# Altium PCB 蓝牙钥匙球锁20710.PcbDoc (part 1 of 2)
Units mil, origin at the board's own origin, x right, y up, seen from the top; angles counter-clockwise.
Board outline 1980 x 1974 mil, 2 copper layers (Top Layer, Bottom Layer); 82 components, 54 nets, 254 pads, 214 vias.
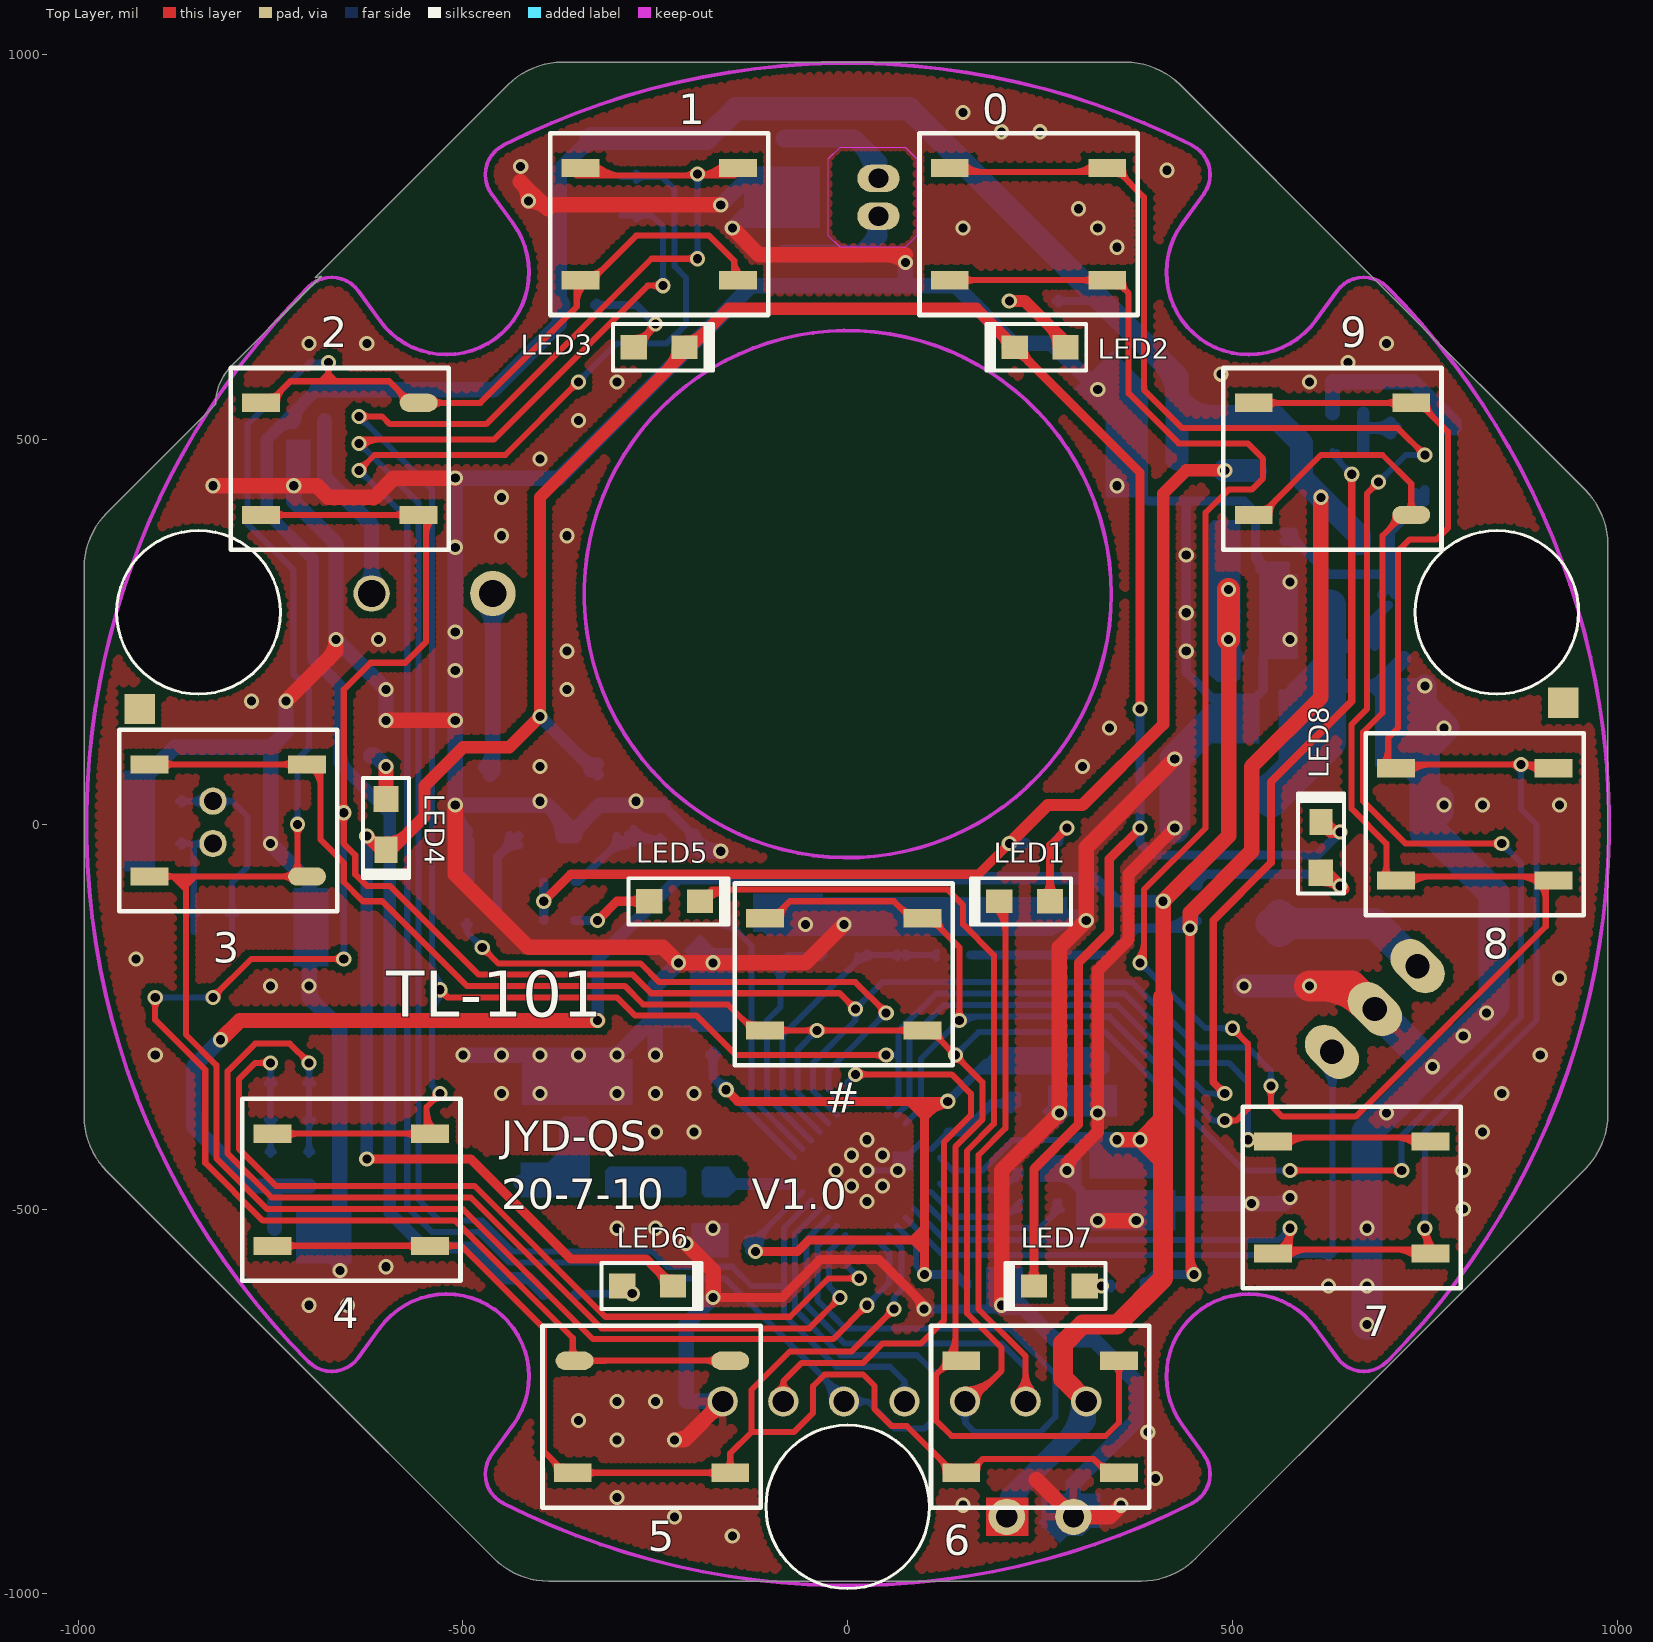
[diagram p0: Top Layer view]
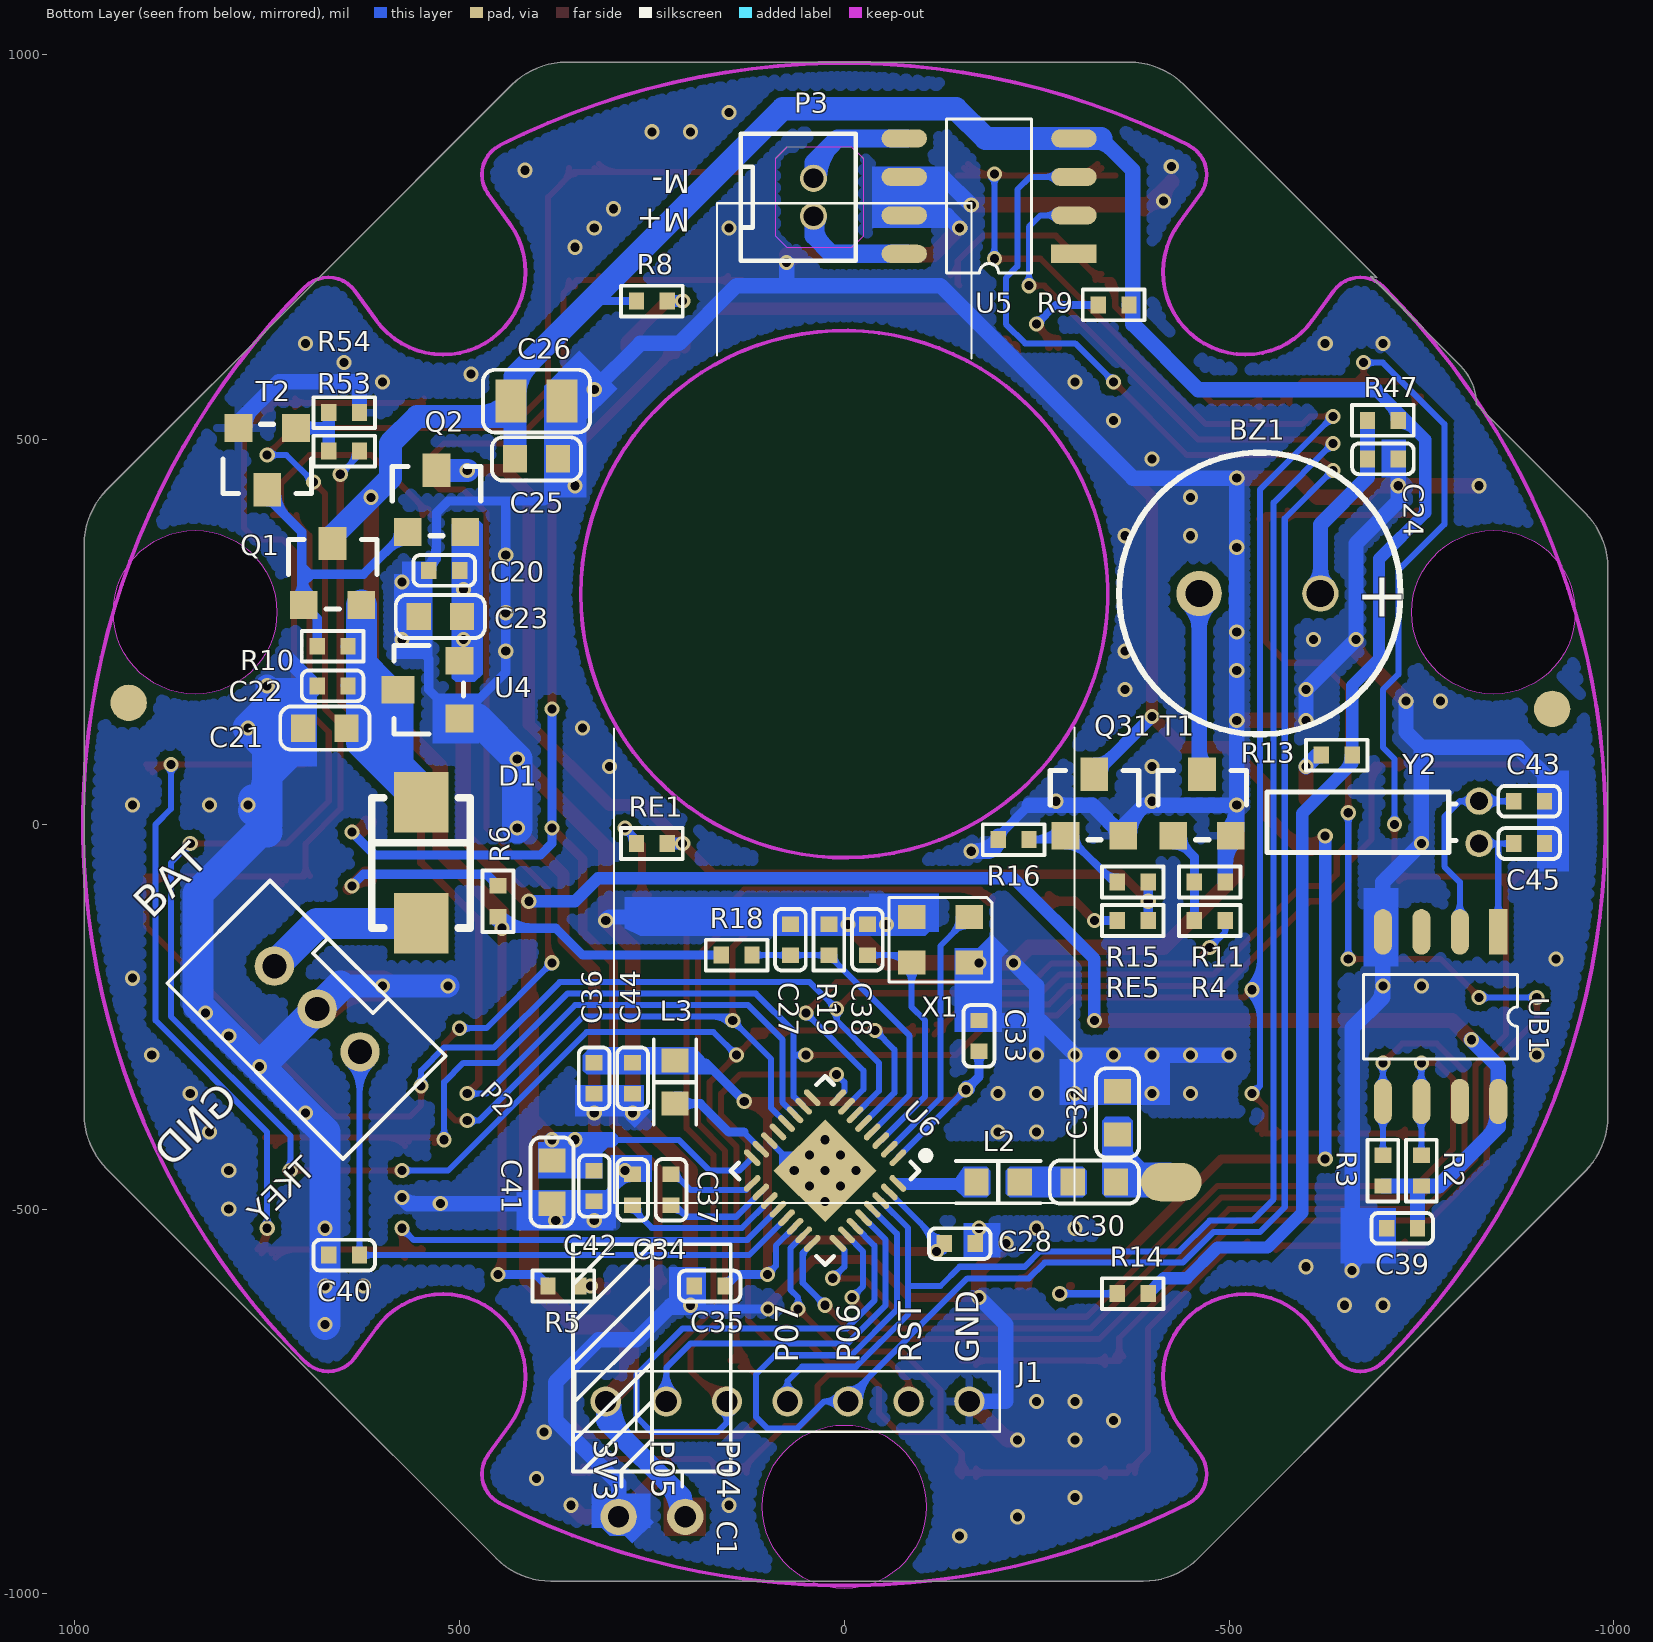
[diagram p1: Bottom Layer view, seen from below]
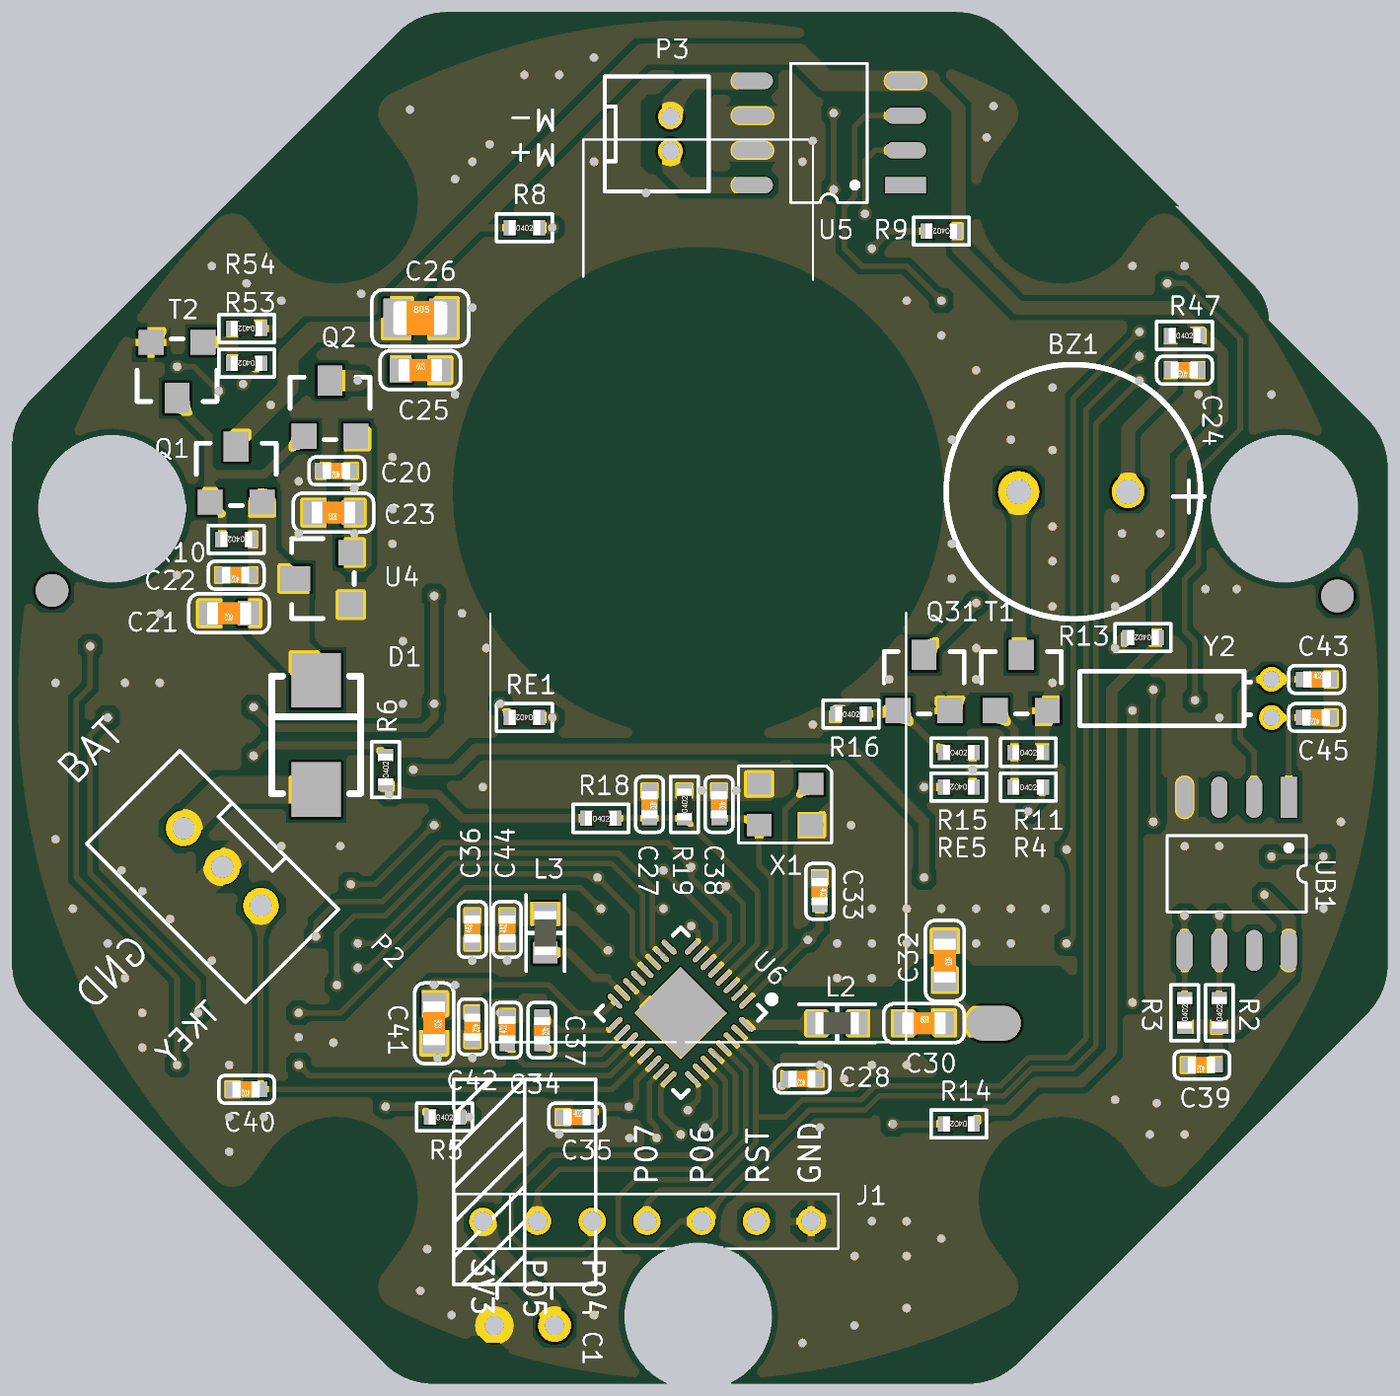
[diagram p3: 3D render of the assembled board from below, using the file's embedded part models]

## Layer stack, top to bottom
Top Layer: signal copper 1.4
Dielectric: core 12.6, FR-4, Dk 4.8
Bottom Layer: signal copper 1.4

## Board outline
-684.23,712.41 -800.72,595.92 ccw(c-751.22,546.41) -821.23,546.41 -962.94,404.7 ccw(c-892.23,333.99) -992.23,333.99 -992.23,-54.59 -992.23,-380.17 ccw(c-892.23,-380.17) -962.94,-450.88 -734.23,-679.59 -459.52,-954.3 ccw(c-388.81,-883.59) -388.81,-983.59 -15.23,-983.59 381.35,-983.59 ccw(c381.35,-883.59) 452.06,-954.3 718.77,-687.59 958.48,-447.88 ccw(c887.77,-377.17) 987.77,-377.17 987.77,119.41 987.77,363.99 ccw(c887.77,363.99) 958.48,434.7 682.77,710.41 432.06,961.12 ccw(c361.35,890.41) 361.35,990.41 -33.23,990.41 -370.81,990.41 ccw(c-370.81,890.41) -441.52,961.12 -692.23,710.41
cut-out: 843.7,381.89 ccw(c843.7,275.59) 737.4,275.59 ccw(c843.7,275.59) 843.7,169.29 ccw(c843.7,275.59) 950,275.59 ccw(c843.7,275.59)
cut-out: 0,-780.71 ccw(c0,-887.01) -106.3,-887.01 ccw(c0,-887.01) 0,-993.31 ccw(c0,-887.01) 106.3,-887.01 ccw(c0,-887.01)
cut-out: -843.7,381.89 ccw(c-843.7,275.59) -950,275.59 ccw(c-843.7,275.59) -843.7,169.29 ccw(c-843.7,275.59) -737.4,275.59 ccw(c-843.7,275.59)

## Design rules (kind name [scope] priority, off if disabled: settings)
Clearance [All] p1: gap=6
ComponentClearance [All] p1: gap=0 collisioncheckmode=3 verticalgap=0 showdistances=FALSE
FabricationTestpoint [(IsPad And (OnTopLayer Or OnBottomLayer))] p1: side=3 testpointundercomponent=TRUE minsize=40 maxsize=100 preferedsize=60 minholesize=0 maxholesize=40 preferedholesize=32 testpointgrid=1 allowsidetop=TRUE allowsidebottom=TRUE usegrid=TRUE gridtolerance=0.01
HoleSize [All] p1: absolutevalues=TRUE maxlimit=1000 minlimit=1 maxpercent=80.000 minpercent=20.000
MinimumSolderMaskSliver [All] p1: minsoldermaskwidth=0
PlaneConnect PlaneConnect_1 [All] p1: planeconnectstyle=Relief reliefexpansion=20 reliefentries=4 reliefconductorwidth=10 reliefairgap=10
PolygonConnect PolygonConnect_1 [IsVia] p1: connectstyle=Direct reliefconductorwidth=10 reliefentries=4 polygonreliefangle="90 Angle" airgapwidth=10
PolygonConnect [All] p2: connectstyle=Relief reliefconductorwidth=10 reliefentries=4 polygonreliefangle="90 Angle" airgapwidth=10
RoutingVias [All] p1: holewidth=15.75 width=23.62 viastyle="Through Hole" minholewidth=11.81 minwidth=19.68 maxholewidth=15.75 maxwidth=23.62
SilkToSilkClearance [All] p1: silktosilkclearance=0
SilkToSolderMaskClearance [IsPad] p1: minsilkscreentomaskgap=0 clearancetoexposedcopper=TRUE
SolderMaskExpansion [All] p1: expansion=4
Width [All] p1: maxlimit=80 minlimit=7.87 preferedwidth=10
21 further rules are at their usual default settings.

## Components (designator, comment, footprint, x,y, rotation, side; value= is the part's Value field where it differs from the comment)
0 "SW" KEY_5.2*3.7*6.4#1 235,780 r0 top
1 "SW" KEY_5.2*3.7*6.4#1 -245,780 r0 top
2 "SW" KEY_5.2*3.7*6.4#2 -660,475 r180 top
3 "SW" KEY_5.2*3.7*6.4#3 -805,5 r0 top
4 "SW" KEY_5.2*3.7*6.4#1 -645,-475 r0 top
5 "SW" KEY_5.2*3.7*6.4#4 -255,-770 r0 top
6 "SW" KEY_5.2*3.7*6.4#1 250,-770 r0 top
7 "SW" KEY_5.2*3.7*6.4#1 655,-485 r0 top
8 "SW" KEY_5.2*3.7*6.4#1 815,0 r180 top
9 "SW" KEY_5.2*3.7*6.4#5 630,475 r180 top
# "SW" KEY_5.2*3.7*6.4#1 -5,-195 r180 top
BZ1 "BUZZER" BUZZER_D93_L40 -540,300 r0 bottom
C1 "220uF/6.3V" R5*8_1 250,-900 r0 bottom
C20 "0.1uF" 0402C 520,330 r0 bottom
C21 "22uF/10V" 0603C 675,125 r0 bottom
C22 "0.1uF" 0402C 665,180 r0 bottom
C23 "10uF/10V" 0603C 525,270 r0 bottom
C24 "10uF/10V" 0402C -700,475 r0 bottom
C25 "0.1uF" 0603C 400,475 r180 bottom
C26 "22uF" 0805C 400,550 r180 bottom
C27 "1nF" 0402C 70,-150 r270 bottom
C28 "1uF/6.3V" 0402C -150,-545 r0 bottom
C30 "1.5pF" 0603C -325,-465 r180 bottom
C32 "1pF" 0603C -355,-375 r270 bottom
C33 "0.1uF" 0402C -175,-275 r270 bottom
C34 "0.1uF" 0402C 275,-475 r90 bottom
C35 "1uF" 0402C 175,-600 r180 bottom
C36 "0.1uF" 0402C 325,-330 r90 bottom
C37 "0.1uF" 0402C 225,-475 r270 bottom
C38 "12pF" 0402C -30,-150 r270 bottom
C39 "0.1uF" 0402C -725,-525 r0 bottom
C40 "1nF" 0402C 650,-560 r0 bottom
C41 "10uF/6.3V" 0603C 380,-465 r270 bottom
C42 "0.1uF" 0402C 325,-470 r270 bottom
C43 "22pF" 0402C -890,30 r180 bottom
C44 "10uF/6.3V" 0402C 275,-330 r90 bottom
C45 "22pF" 0402C -890,-25 r0 bottom
D1 "SS14" DO-214AA 550,-50 r270 bottom
J1 "7P" 7P-2.0MM 310,-750 r180 bottom
L2 "2nH" 0603L -200,-465 r0 bottom
L3 "2.2uH" 0603L 220,-335 r270 bottom
LED1 "GREEN" 0603LED 230,-100 r180 top
LED2 "Blue" 0603LED 250,620 r180 top
LED3 "Blue" 0603LED -245,620 r0 top
LED4 "Blue" 0603LED -600,0 r270 top
LED5 "Red" 0603LED -225,-100 r0 top
LED6 "Blue" 0603LED -260,-600 r0 top
LED7 "Blue" 0603LED 275,-600 r180 top
LED8 "Blue" 0603LED 615,-30 r90 top
P2 "电池盒" B3B-PH 685,-240 r225 bottom
P3 "电机接口" 2P-1.25 40,815 r270 bottom
Q1 "SI2301" "SOT-23 - GDS" 665,325 r180 bottom
Q2 "SI2301" "SOT-23 - GDS" 530,420 r180 bottom
Q31 "PMBT3904" "SOT-23 - BCE" -325,25 r180 bottom
R2 "10K" 0402R -750,-450 r90 bottom
R3 "10K" 0402R -700,-450 r90 bottom
R4 "1K" 0402R -475,-125 r180 bottom
R5 "1K" 0402R 365,-600 r180 bottom
R6 "1K" 0402R 450,-100 r90 bottom
R8 "1K" 0402R 250,680 r180 bottom
R9 "1K" 0402R -350,675 r0 bottom
R10 "100K" 0402R 665,231.42 r0 bottom
R11 "10K" 0402R -475,-75 r180 bottom
R13 "1k" 0402R -640,90 r0 bottom
R14 "1K" 0402R -375,-610 r0 bottom
R15 "10K" 0402R -375,-75 r180 bottom
R16 "4.7K" 0402R -220,-20 r180 bottom
R18 "500K%1" 0402R 140,-170 r180 bottom
R19 "100K%1" 0402R 20,-150 r90 bottom
R47 "10R" 0402R -700,525 r180 bottom
R53 "1K" 0402R 650,485 r0 bottom
R54 "10K" 0402R 650,535 r0 bottom
RE1 "1K" 0402R 250,-25 r0 bottom
RE5 "1K" 0402R -375,-125 r0 bottom
T1 "SS8050" SOT-23-3L -465,25 r180 bottom
T2 "PMBT3904" SOT-23-3L 750,475 r0 bottom
U4 "HT7533" SOT-23-3L 540,175 r90 bottom
U5 "CP2117" SOP8 -188.23,816.41 r0 bottom (schematic designator U8)
U6 "BK3431Q" QFN32_4*4*0.4 25,-450 r315 bottom
UB1 "PCF8563" SOP8 -775,-250 r270 bottom (schematic designator U5)
X1 "16MHZ" XTAL3225 -125,-150 r0 bottom
Y2 "32.768KHZ" 晶振-9 -825,-25 r90 bottom

## Footprints (in the part's own frame and the unit in brackets; to place one, negate y for a bottom-side part, rotate by r counter-clockwise, add the part's x,y. Pads: shape width x height; smd on the part's side, far side on the other; paste and mask are expansions set on the pad)
2P-1.25 [mm]
  round 0.9 / inner round 0.9 / far side oval 0.9x1.4 hole 0.65: 1(-0.625,0) 2(0.625,0)
  silkscreen extent -2.1,-2.4 2.1,1.4
7P-2.0MM [mm]
  round 1 hole 0.7 mask+0.05: 1(0,0) 2(2,0) 3(4,0) 4(6,0) 5(8,0) 6(10,0) 7(12,0)
  silkscreen extent -1,-1 13,1
0402C [mil]
  rect 20x22 smd mask+2: 1(-20,0) 2(20,0)
  silkscreen extent -40,-20 40,20, body extent -19,-12 20,12, height 8
0402R [mil]
  rect 20x22 smd mask+2: 1(-20,0) 2(20,0)
  silkscreen extent -40,-20 40,20, body extent -23,-11 23,11, height 16
0603C [mm]
  rect 0.8x0.9 smd: 1(-0.711,0) 2(0.711,0)
  silkscreen extent -1.47,-0.71 1.47,0.71, body extent -0.8,-0.4 0.8,0.4, height 0.3
0603L [mm]
  rect 0.8x0.9 smd: 1(-0.711,0) 2(0.711,0)
  silkscreen extent -1.4,-0.7 1.4,0.7, body extent -0.82,-0.41 0.82,0.41, height 0.46
0603LED [mil]
  rect 34x32 smd: 1(-33,0)
  rect 34x30 smd: 2(33,0)
  silkscreen extent -60,-30 70,30, body extent -31,-16 31,16, height 24
0805C [mil]
  rect 40x56 smd: 1(-33,0) 2(33,0)
  silkscreen extent -70,-41 70,41, body extent -39,-25 39,25, height 30
B3B-PH [mm]
  round 1.3 / inner round 1.3 / far side oval 1.3x2 hole 0.8 mask+0.05: 1(-2,0) 2(0,0) 3(2,0)
  silkscreen extent -4.1,-2.9 4.1,1.9
BUZZER_D93_L40 [mm]
  round 1.2 hole 0.9: 1(-2,0)
  round 1.5 hole 0.9: 2(2,0)
  silkscreen extent -4.65,-4.65 4.65,4.65
DO-214AA [mm]
  rect 2x1.8 smd: 1(2,0) 2(-2,0)
  silkscreen extent -2.15,-1.63 2.15,1.63
KEY_5.2*3.7*6.4#1 [mm]
  rect 1.25x0.6 smd: 1(-2.6,1.85) 1(2.6,1.85) 2(-2.6,-1.85) 2(2.6,-1.85)
  silkscreen extent -3.6,-3 3.6,3
KEY_5.2*3.7*6.4#2 [mm]
  rect 1.25x0.6 smd: 1(-2.6,1.85) 1(2.6,1.85) 2(2.6,-1.85)
  oval 1.25x0.6 smd: 2(-2.6,-1.85)
  silkscreen extent -3.6,-3 3.6,3
KEY_5.2*3.7*6.4#3 [mm]
  rect 1.25x0.6 smd: 1(-2.6,1.85) 1(2.6,1.85) 2(-2.6,-1.85)
  oval 1.25x0.6 smd: 2(2.6,-1.85)
  silkscreen extent -3.6,-3 3.6,3
KEY_5.2*3.7*6.4#4 [mm]
  oval 1.25x0.6 smd: 1(-2.54,1.85) 1(2.6,1.85)
  rect 1.25x0.6 smd: 2(-2.6,-1.85) 2(2.6,-1.85)
  silkscreen extent -3.6,-3 3.6,3
KEY_5.2*3.7*6.4#5 [mm]
  oval 1.25x0.6 smd: 1(-2.6,1.85)
  rect 1.25x0.6 smd: 1(2.6,1.85) 2(-2.6,-1.85) 2(2.6,-1.85)
  silkscreen extent -3.6,-3 3.6,3
QFN32_4*4*0.4 [mm]
  rect 2.4x2.4 smd paste-0.025 mask+0.051: 0(0,0)
  oval 0.7x0.2 smd paste-0.025 mask+0.051: 1(-2,1.4) 2(-2,1) 3(-2,0.6) 4(-2,0.2) 5(-2,-0.2) 6(-2,-0.6) 7(-2,-1) 8(-2,-1.4) 17(2,-1.4) 18(2,-1) 19(2,-0.6) 20(2,-0.2) 21(2,0.2) 22(2,0.6) 23(2,1) 24(2,1.4)
  oval 0.2x0.7 smd paste-0.025 mask+0.051: 9(-1.4,-2) 10(-1,-2) 11(-0.6,-2) 12(-0.2,-2) 13(0.2,-2) 14(0.6,-2) 15(1,-2) 16(1.4,-2) 25(1.4,2) 26(1,2) 27(0.6,2) 28(0.2,2) 29(-0.2,2) 30(-0.6,2) 31(-1,2) 32(-1.4,2)
  silkscreen extent -2.82,-2.2 2.2,2.2
R5*8_1 [mm]
  round 1.2 hole 0.7 paste+0: 1(-1.1,0)
  round 1.2 hole 0.7: 2(1.1,0)
  silkscreen extent -2.6,-9 2.6,-1
SOP8 [mm]
  rect 1.5x0.6 smd mask+0.05: 1(-2.8,1.905)
  oval 1.5x0.6 smd mask+0.05: 2(-2.8,0.635) 3(-2.8,-0.635) 4(-2.8,-1.905) 5(2.8,-1.905) 6(2.8,-0.635) 7(2.8,0.635) 8(2.8,1.905)
  round 0.4 on Bottom Overlay mask+0.05: ""(-0.949,1.905)
  silkscreen extent -1.4,-2.54 1.4,2.54
"SOT-23 - BCE" [mil]
  rect 36x36 smd: B(-37.4,-40) E(37.4,-40)
  rect 36x43.31 smd: C(0,40)
  silkscreen extent -57,-45 58,45
"SOT-23 - GDS" [mil]
  rect 36x43.31 smd: D(0,40)
  rect 36x36 smd: G(-37.4,-40) S(37.4,-40)
  silkscreen extent -57,-45 58,45
SOT-23-3L [mil]
  rect 36x36 smd: 1(-37.4,-40) 2(37.4,-40)
  rect 36x43.31 smd: 3(0,40)
  silkscreen extent -57,-45 58,45
XTAL3225 [mm]
  rect 0.9x0.8 smd: 1(-0.95,-0.75) 2(0.95,-0.75) 3(0.95,0.75) 4(-0.95,0.75)
  silkscreen extent -1.7,-1.4 1.7,1.4
晶振-9 [mm]
  round 0.9 hole 0.6: 1(0,0) 2(1.4,0)
  rect 0x0 smd: 3(0.635,8)
  silkscreen extent -0.3,0.76 1.7,7

## Part data
0 1 2 3 4 5 6 7 8 9 #: "Switch"
BZ1: "Buzzer"
C1 C21 C23: library part CAP-P, "Capacitor, tolerance ±20%"
C20 C22 C25 C26 C27: library part CAP-NP, "Capacitor, Ceramic"
C24: library part C_0_Dup1
C28 C30 C32 C33 C34 C35 C36 C37 C38 C41 C42 C44: library part Cap, "Capacitor"
C39 C40 C43 C45: library part C
D1: library part D
L2 L3: "Power Inductor, 4.7uH, 0.7A, 260mR DCR"
LED1 LED2 LED3 LED4 LED5 LED6 LED7 LED8: library part LED
P2: library part "Header 3", "Header, 3-Pin"
Q1 Q2: library part PWRMOSFET_EP_DGS_0
R2 R3: library part RES
R4 R11 R47: library part R_Dup1
R5 R6 R8 R9 R10 R13 R14 R15 R16 R53 R54 RE1 RE5: library part R
R18 R19: library part Res2, "Resistor"
T1 T2: library part NPN_BJT, "Bipolar Junction Transistor"
U4: library part XC6206P302M
U5: library part AM24LC02_0
UB1: library part IC8
Y2: library part 晶振

## Free pads (board coordinates)
  round 47.24 hole 125.98: 1(0,-887.01) 2(-843.7,275.59) 3(843.7,275.59)
  oval 78.74x50 smd far side: FR(-425,-465)
  rect 39.37x39.37 smd: MARK(-920,150) MARK(930,157.93)
  round 47.24 smd far side: MARK(-920,150) MARK(930,157.93)

## Via types
v1: diameter 19.68, hole 11.81, Top Layer to Bottom Layer, tented both sides, 214 vias

## Nets (pads, with @x,y where several pads share a name; then routed paths per layer and width w, separated by ;. In a path a pad name is that pad's centre, name@x,y a point inside that pad or via, vN(x,y) a via of type N, cw(c..) or ccw(c..) an arc to the next point about the centre after c; other vN are vias at no path point)
BAT_ADC: C27.2 R18.2 R19.1 U6.4 | length 503.5
  Bottom Layer w7.87: U6.4@-36.25,-399.89 -85,-351.14 -85,-275 R19.1@20,-170 R18.2@115,-170 ; 7.94,-182.06 ccw(c-4.11,-170) R19.1@12.94,-170 ; R19.1@10.36,-179.64 cw(c19,-188.29) R19.1@19,-176.06 ; R19.1@25.29,-174.29 cw(c35.64,-184.64) 35.64,-170 cw(c35.64,-155.36) R19.1@25.29,-165.71 ; C27.2@64.71,-174.29 ccw(c54.36,-184.64) 54.36,-170 ccw(c54.36,-155.36) C27.2@64.71,-165.71 ; C27.2@75.29,-174.29 cw(c85.64,-184.64) 85.64,-170 cw(c85.64,-155.36) C27.2@75.29,-165.71 ; R18.2@115.71,-174.29 ccw(c105.36,-184.64) 105.36,-170 ccw(c105.36,-155.36) R18.2@115.71,-165.71
BEEP: R4.2 U6.7 | length 876.3
  Top Layer w7.87: v1@-475,-165.91 cw(c-475,-180.16) -464.92,-170.08 cw(c-454.84,-160) v1@-469.09,-160 ; v1(-475,-160) -454.13,-180.87 -269.13,-180.87 -245,-205 10,-205 v1(50,-245) ; v1@44.09,-245 ccw(c29.84,-245) 39.92,-234.92 ccw(c50,-224.84) v1@50,-239.09
  Bottom Layer w7.87: R4.2@-499.15,-130.42 cw(c-508.13,-140) -495,-140 ; R4.2@-495,-125 -495,-140 ; R4.2@-490.85,-130.42 ccw(c-481.87,-140) -495,-140 ; v1@-480.91,-160 ccw(c-495.16,-160) -485.08,-149.92 ccw(c-475,-139.84) v1@-475,-154.09 ; v1(-475,-160) -495,-140 ; U6.7@-2.84,-366.48 -25,-344.32 -25,-320 v1(50,-245) ; v1@44.09,-245 cw(c29.84,-245) 39.92,-255.08 cw(c50,-265.16) v1@50,-250.91
GND: C1.2 C20.2 C21.2 C22.2 C23.2 C24.1 C25.2 C26.2 C27.1 C28.1 C32.1 C33.1 C34.2 C35.1 C36.1 C38.1 C39.2 C40.2 C41.2 C42.2 C43.2 C44.1 C45.1 J1.7 P2.2 Q31.E R11.2 R16.1 R19.2 R54.1 T1.2 T2.2 U4.1 U5.6 U5.7 U6.0 U6.14 UB1.4 X1.2 X1.4 | length 14985.3
  Top Layer w12: v1(-175,-615) -85,-615 -35.5,-565.5 40.5,-565.5 v1@100,-625 ; 88.2,-613.2 cw(c71.4,-630) v1@95.16,-630
  Top Layer w16: v1(285,-450) 285,-440 325,-400 325,-190 365,-150 365,-65 v1(425,-5) ; v1@286.84,-450 cw(c315.43,-450) 295.22,-429.78
  Top Layer w20: v1(-825,440) v1(-720,440) -690,440 -675,425 -615,425 -590,450 v1(-510,450) ; v1(-730,160) -665,225 v1(-665,240) ; -675.34,214.66 ccw(c-700.68,240) v1@-664.84,240 ; v1(-600,135) v1(-510,135) ; v1(-510,25) -510,-65 -415,-160 -240,-160 v1(-220,-180) v1(-175,-180) -55,-180 v1(-5,-130) ; -425.34,835.34 cw(c-450.68,810) v1@-414.84,810 ; -425,835 -395,805 v1(-165,805) ; v1@-415,810.16 cw(c-415,774.32) -389.66,799.66 ; v1@-225,-800.16 ccw(c-225,-770.22) -203.83,-791.39 ; v1(-225,-800) -212.44,-800 J1.7@-162.44,-750 ; v1(-210,-545) -175,-580 v1(-175,-615) ; J1.7@-172.13,-750 cw(c-195.51,-750) -178.97,-766.53 cw(c-162.44,-783.07) J1.7@-162.44,-759.68 ; v1(-150,775) -115,740 75,740 ; 51.24,740 cw(c51.24,706.24) v1@75.11,730.11 ; v1(200,-625) 200,-450 v1(275,-375) 275,-160 v1(310,-125) 310,-30 v1(425,85) ; 245.12,-851.81 C1.2@293.31,-900 340,-900 v1(355,-885) ; C1.2@283.62,-900 ccw(c260.24,-900) 276.77,-883.47 ccw(c293.31,-866.93) C1.2@293.31,-890.32 ; C1.2@300.16,-906.85 cw(c316.69,-923.38) 316.69,-900 cw(c316.69,-876.62) C1.2@300.16,-893.15 ; v1(325,-515) v1(375,-515)
  Top Layer w40: v1(600,-210) 655,-210 P2.2@685,-240 ; 612.86,-210 cw(c612.86,-292.66) P2.2@671.3,-234.21
  Bottom Layer w7.87: v1(25,-450) 58.41,-450 U6.14@97.38,-411.03 ; U6.0@29.18,-454.18 cw(c39.26,-464.26) 39.26,-450 cw(c39.26,-435.74) U6.0@29.18,-445.82 ; U6.0@60.82,-454.18 ccw(c50.74,-464.26) 50.74,-450 ccw(c50.74,-435.74) U6.0@60.82,-445.82 ; U6.0@70.91,-450 cw(c101.08,-450) 79.74,-428.66
  Bottom Layer w10: C34.2@276,-460 cw(c276,-481.73) 291.36,-466.36 ; C34.2@280,-450 C34.2@275,-450 ; C34.2@280.16,-449.92 cw(c275,-449.84) C34.2@275,-455 280,-455 315,-490 C42.2@325,-490 325,-493 C42.2@323,-493 ; C34.2@281.2,-453 ccw(c275,-457.9) C34.2@275,-450 ; C34.2@281.2,-447 cw(c275,-442.1) C34.2@275,-450 ; v1@289.84,-450 ccw(c325.68,-450) 300.34,-475.34 ; 300.1,-475.1 ccw(c324,-451.2) C42.2@324,-485
  Bottom Layer w11.81: C26.2@357.03,532.03 cw(c332.97,507.97) 367,507.97 cw(c401.03,507.97) C26.2@376.97,532.03 ; 367,442.59 cw(c395.8,442.59) C25.2@378.06,465.28 ; 367,512.8 ccw(c407.83,512.8) C25.2@378.96,483.93 ; C26.2@367,550 367,443 390,420 440,420 ; U4.1@485,137.6 500,122.6 500,135 540,175 540,215 563,238 563,302 ; U4.1@487.91,137.6 ccw(c458.71,137.6) 479.35,158.24 ccw(c500,178.89) 500,149.69 ccw(c500,185.16) 525.08,160.08 ; U4.1@500,137.6 440,197.6 v1(440,225) v1(440,275) v1(440,350) 440,420 ; U4.1@512.09,137.6 cw(c535.02,137.6) 518.81,153.81 ; 530,365.03 ccw(c574.03,365.03) C20.2@542.9,333.9 ; 530.18,344.82 cw(c516.36,331) C20.2@535.91,331 ; C20.2@543.34,331.37 ccw(c575,353.8) v1(575,315) 550,315 ; C20.2@544.06,328.49 ccw(c557.77,326.77) 548,317 ; C20.2@544.09,329 ccw(c563.64,329) 549.82,315.18 ; 545,309.91 cw(c545,285.53) 562.23,302.77 ; 545,315 550,315 ; C20.2@545,330 530,345 530,405 515,420 440,420 ; C23.2@548.71,259.17 cw(c537.68,236.38) 563,236.38 ; C23.2@549.14,281.02 ccw(c540.2,302) 563,302 ; 551.21,226.21 cw(c575,202.42) v1@575,236.06 ; C23.2@553.86,269.8 cw(c546.8,255.22) C23.2@563,255.22 ; 558,233 cw(c568.36,222.64) v1@573.59,236.32 ; 563,249.96 ccw(c584.96,249.96) v1@569.43,234.43 ; C23.2@563,278.48 ccw(c613.48,278.48) v1@577.78,242.78 ; 550,315 563,302
  Bottom Layer w12: -240.39,25 R16.1@-200,-15.39 ; -209.38,-6.01 cw(c-222.37,-19) R16.1@-204,-19 ; v1(99,-630) 195,-630 v1@197.31,-627.69 ; 178.65,-630 ccw(c178.65,-603.65) v1@197.28,-622.28
  Bottom Layer w20: C45.1@-910,-25 C43.2@-910,30 -910,65 -875,100 -750,100 ; v1(-730,160) -730,120 -750,100 ; C24.1@-720,475 v1(-720,440) -720,420 -665,365 v1(-665,240) v1(-600,175) v1(-600,135) ; v1@-700.16,-210 ccw(c-664.32,-210) -689.66,-235.34 ; -666.8,-563.2 cw(c-683.6,-580) v1@-659.84,-580 ; v1(-660,-580) -660,-570 C39.2@-705,-525 -660,-525 -660,-265 -700,-225 UB1.4@-700,-139.76 -700,-75 v1(-750,-25) -750,100 ; v1@-510,22.66 ccw(c-464.75,22.66) T1.2@-496.75,-9.34 ; T1.2@-508.06,-20.66 cw(c-539.59,-52.18) -495,-52.18 ; v1(-500,-300) v1(-450,-300) v1(-400,-300) v1(-350,-300) ; R11.2@-495,-75 -495,-22.4 T1.2@-502.4,-15 -510,-7.4 v1(-510,25) ; -411.69,25 ccw(c-411.69,41.69) v1@-399.89,29.89 ; v1@-400.12,29.9 ccw(c-390,37.9) -390,25 ; -384.83,19.83 cw(c-419.66,-15) Q31.E@-370.4,-15 ; Q31.E@-362.4,-7 ccw(c-362.4,12.31) -348.75,-1.34 ccw(c-335.09,-15) Q31.E@-354.4,-15 ; C32.1@-357.1,-342.94 ccw(c-374.23,-325.8) -350,-325.8 ; C32.1@-355,-347 -350,-342 v1(-350,-300) ; -286.69,25 ccw(c-286.69,41.69) v1@-274.89,29.89 ; v1@-275.11,29.89 ccw(c-263.31,41.69) -263.31,25 ; v1(-250,-300) -250,-255 ; -240.39,25 -322.4,25 Q31.E@-362.4,-15 -362.4,-2.6 -390,25 ; v1(-220,-180) -250,-210 -250,-255 ; v1(-210,-545) C28.1@-170,-545 ; R16.1@-200,-15.39 R16.1@-200,-20 -185,-35 ; v1(-175,-615) -210,-650 -210,-750 J1.7@-162.44,-750 ; -175,-219.07 cw(c-124.83,-219.07) X1.4@-160.31,-183.59 ; v1(-175,-180) C33.1@-175,-255 -250,-255 ; J1.7@-169.29,-756.85 ccw(c-185.82,-773.38) -185.82,-750 ccw(c-185.82,-726.62) J1.7@-169.29,-743.15 ; v1@-166.2,-35 cw(c-166.2,12.8) -200,-21 ccw(c-185,-19.96) -185,-35 ; v1(-165,-35) -185,-35 ; v1(-165,805) -128.59,841.41 U5.6@-82.17,841.41 ; v1(-150,775) -133.59,791.41 U5.7@-82.17,791.41 ; X1.2@-87.6,-120.47 C38.1@-30,-120.47 ; X1.2@-77.62,-120.47 cw(c-77.62,-152.62) v1@-54.89,-129.89 ; v1@-55.11,-129.89 cw(c-32.38,-152.62) C38.1@-32.38,-120.47 ; v1@-54,-120.47 cw(c-54,-153) C38.1@-31,-130 ; C38.1@-30,-130 C38.1@-30,-120.47 ; C38.1@-29,-130 cw(c-6,-153) v1@-6,-120.47 ; C38.1@-27.62,-120.47 cw(c-27.62,-152.62) v1@-4.89,-129.89 ; v1@-5.11,-129.89 cw(c17.62,-152.62) R19.2@17.62,-120.47 ; v1@-4,-120.47 cw(c-4,-153) R19.2@19,-130 ; R19.2@20,-130 R19.2@20,-120.47 ; R19.2@21,-130 cw(c44,-153) 44,-120.47 ; 46,-120.47 cw(c46,-153) C27.1@69,-130 ; C27.1@70,-130 C27.1@70,-120.47 ; C27.1@71,-130 cw(c94,-153) 94,-120.47 ; 72.47,-118 C27.1@70,-120.47 ; v1(75,730) 75,700 ; C35.1@195,-601 cw(c182.93,-613.07) 200,-613.07 ; C35.1@195,-600 200,-605 v1(200,-625) 225,-625 227.69,-627.69 ; v1@197.31,-627.69 227.69,-627.69 ; v1(275,-375) C44.1@275,-350 C36.1@325,-350 ; C1.2@286.46,-893.15 ccw(c269.93,-876.62) 293.31,-876.62 ccw(c316.69,-876.62) C1.2@300.16,-893.15 ; C1.2@289.37,-900 C1.2@293.31,-896.06 ; C1.2@293.31,-900 C1.2@293.31,-896.06 ; 299.45,-120.47 cw(c299.45,-135.55) v1@310.11,-124.89 ; v1(310,-125) 305.47,-120.47 C27.1@70,-120.47 ; v1(325,-515) C42.2@325,-490 328,-493 C41.2@380,-493 ; C26.2@359.93,542.93 ccw(c342.86,525.86) 342.86,550 ccw(c342.86,574.14) C26.2@359.93,557.07 ; C26.2@367,550 340,550 v1(325,565) 265,625 215,625 140,700 75,700 ; v1@374.89,-515.11 cw(c383.61,-506.61) C41.2@375,-498 ; v1@374.85,-515.05 cw(c395.17,-508.17) C41.2@380,-493 ; v1(375,-515) C41.2@375,-498 ; v1@375,-514.2 cw(c399.23,-514.2) C41.2@382.1,-497.06 ; 556.07,-493 ccw(c556.07,-466.07) v1@575.11,-485.11 ; v1(575,-485) 567,-493 C41.2@380,-493 ; R54.1@630,535 630,575 735,575 787.4,522.6 T2.2@787.4,515 ; P2.2@685,-240 P2.2@695,-250 ; 722.95,215 C22.2@687.95,180 ; v1(750,180) 710,180 ; 767.89,32.25 750,50.14 703,97.14 C21.2@703,125 703,162 C22.2@685,180 C22.2@687.95,180 ; 768.37,541.63 cw(c741.75,515) T2.2@779.4,515 ; v1(775,125) 728,125 728,162 710,180 ; v1(-510,25) v1(-510,135) v1(-510,200) v1(-510,450) -375,450 -125,700 75,700 ; v1(-510,25) -390,25 ; v1(-350,-300) v1(-300,-300) -255,-255 -250,-255 ; C38.1@-30,-120.47 R19.2@20,-120.47 ; R19.2@20,-120.47 C27.1@70,-120.47 ; 227.69,-627.69 270,-670 320,-670 375,-725 375,-775 293.31,-856.69 C1.2@293.31,-896.06 ; C41.2@375,-498 C41.2@380,-493 ; C22.2@687.95,180 710,180
  Bottom Layer w30: v1(515,-210) v1(600,-210) 655,-210 ; C21.2@703,125 728,125 ; 750,150 v1(750,180)
  Bottom Layer w40: v1(425,-5) v1(425,85) 477.6,137.6 U4.1@485,137.6 ; 465.17,125.17 cw(c500,90.34) U4.1@500,139.6 ; 466.4,126.4 cw(c498.34,94.45) U4.1@500.08,139.6 ; 655,-210 P2.2@685,-240 ; v1(675,-650) v1(675,-600) v1(675,-525) 675,-400 v1(700,-375) v1(760,-315) ; P2.2@695,-250 v1(760,-315) ; 750,-10.35 cw(c809.68,-10.35) 767.89,32.25 ; 750,60.83 ccw(c810.83,60.83) 767.82,17.82 ; 750,150 v1(775,125) 750,100 750,50.14 750,0 840,-90 840,-235 v1(830,-245) v1(760,-315)
  other v1: -150,-925 -225,-900 150,-885 -300,-875 400,-850 -300,-800 390,-790 -350,-775 -300,-750 -250,-750 -700,-625 -650,-625 625,-600 -600,-575 -300,-525 -250,-525 -175,-525 800,-500 525,-493 25,-490 5,-470 45,-470 -15,-450 65,-450 800,-450 5,-430 45,-430 25,-410 -250,-400 -200,-400 825,-400 325,-375 -450,-350 -400,-350 -300,-350 -250,-350 -200,-350 850,-350 -900,-300 900,-300 800,-275 -750,-210 -700,-210 925,-200 -925,-175 -55,-130 775,25 825,25 925,25 -400,30 -275,30 -400,75 305,75 340,125 -775,160 -365,175 -365,225 -610,240 575,240 -510,250 -510,360 -450,375 -365,375 -450,425 350,440 -400,475 -350,525 -300,575 600,575 485,585 650,600 -700,625 -625,625 700,625 350,750 150,775 325,775 300,800 -415,810 415,850 -425,855 200,900 250,900 150,925
KEYX_4: 0.2 #.2 U6.12 | length 2990
  Top Layer w7.87: #.2@-102.54,-127.3 -75.24,-100 60,-100 87.3,-127.3 #.2@97.36,-127.3 ; #.2@-94.57,-114.29 ccw(c-94.57,-102.13) #.2@-85.96,-110.73 ; #.2@-86.69,-122.17 cw(c-60.84,-122.17) -79.12,-103.88 ; 67.03,-107.03 ccw(c84.57,-89.48) #.2@84.57,-114.29 ; #.2@72.82,-112.82 cw(c63.48,-122.17) #.2@76.69,-122.17 ; #.2@110.16,-130.04 cw(c110.16,-141.83) #.2@118.49,-133.49 ; #.2@118.03,-122.17 ccw(c144.26,-122.17) 125.71,-140.72 ; 0.2@132.64,707.17 347.83,707.17 365,690 365,560 430,495 520,495 540,475 540,450 525,435 495,435 465,405 465,-5 385,-85 385,-175 v1(380,-180) ; v1@140.82,-250.82 ccw(c130.74,-240.74) 145,-240.74 ccw(c159.26,-240.74) v1@149.18,-250.82 ; v1(145,-255) 145,-160 #.2@112.3,-127.3 ; 0.2@151,701.6 cw(c164.44,688.16) 164.44,707.17 cw(c164.44,726.17) 0.2@151,712.73 ; 0.2@319,701.6 ccw(c305.56,688.16) 305.56,707.17 ccw(c305.56,726.17) 0.2@319,712.73 ; 0.2@350.16,699.29 cw(c350.16,685.89) 0.2@359.63,695.37 ; 0.2@358.01,706.65 ccw(c378,705.33) 363.84,691.16 ; v1@375.82,-175.82 ccw(c353.67,-153.67) 385,-153.67 ; v1(490,-385) 505,-385 520,-370 520,-285 v1(500,-265) ; v1@494.18,-389.18 cw(c504.26,-399.26) 504.26,-385 cw(c504.26,-370.74) v1@494.18,-380.82 ; v1@500,-270.91 cw(c500,-285.16) 510.08,-275.08 cw(c520.16,-265) v1@505.91,-265 ; #.2@97.36,-127.3 #.2@97.36,-122.17 #.2@107.17,-122.17 ; #.2@97.36,-127.3 #.2@112.3,-127.3 ; #.2@107.17,-122.17 #.2@112.3,-127.3 ; #.2@107.17,-122.17 112.17,-122.17 117.3,-127.3 #.2@112.3,-127.3
  Bottom Layer w7.87: U6.12@75.11,-388.75 95,-368.86 95,-305 v1(145,-255) 150,-250 340,-250 475,-385 v1(490,-385) ; v1@139.09,-255 cw(c124.84,-255) 134.92,-265.08 cw(c145,-275.16) v1@145,-260.91 ; v1@149.18,-259.18 cw(c171.33,-281.33) 171.33,-250 ; v1@380,-185.91 cw(c380,-200.16) 390.08,-190.08 cw(c400.16,-180) v1@385.91,-180 ; v1(380,-180) 465,-265 v1(500,-265) ; v1@485.82,-389.18 ccw(c475.74,-399.26) 475.74,-385 ccw(c475.74,-370.74) v1@485.82,-380.82 ; v1@495.82,-269.18 ccw(c485.74,-279.26) 485.74,-265 ccw(c485.74,-250.74) v1@495.82,-260.82
KEYY_1: 3.1 6.1 9.1 #.1 U6.5 | length 5146.5
  Top Layer w7.87: 3.1@-907.19,77.97 -692.97,77.97 3.1@-692.83,77.83 ; 3.1@-889,72.27 cw(c-875.22,58.49) -875.22,77.97 ; 3.1@-889,83.4 ccw(c-875.89,96.51) -875.89,77.97 ; -734.78,77.97 cw(c-734.78,58.49) 3.1@-721,72.27 ; -734.11,77.97 ccw(c-734.11,96.51) 3.1@-721,83.4 ; 3.1@-702.64,77.83 3.1@-692.83,77.83 ; 3.1@-695.41,72.27 cw(c-720.54,47.13) -685,47.13 ; 3.1@-689.84,77.83 cw(c-701.53,66.14) 3.1@-685,66.14 ; -435,-210 -495,-210 ; -137.03,-252.97 ccw(c-120.16,-236.1) #.1@-120.16,-259.96 ; -132.18,-257.82 cw(c-142.19,-267.83) #.1@-128.03,-267.83 ; #.1@-117.03,-272.97 -155.87,-234.13 -265.87,-234.13 -290,-210 -495,-210 ; #.1@-107.36,-267.83 v1(-40,-267.83) #.1@97.36,-267.83 #.1@107.83,-267.83 ; #.1@-89,-273.4 cw(c-75.56,-286.84) -75.56,-267.83 cw(c-75.56,-248.83) #.1@-89,-262.27 ; v1@-44.18,-272.01 ccw(c-54.26,-282.09) -54.26,-267.83 ccw(c-54.26,-253.58) v1@-44.18,-263.66 ; v1@-35.82,-272.01 cw(c-25.74,-282.09) -25.74,-267.83 cw(c-25.74,-253.58) v1@-35.82,-263.66 ; #.1@79,-273.4 ccw(c65.56,-286.84) 65.56,-267.83 ccw(c65.56,-248.83) #.1@79,-262.27 ; #.1@110.16,-275.71 cw(c110.16,-289.11) #.1@119.63,-279.63 ; #.1@117.83,-267.83 #.1@107.83,-267.83 ; 117.97,-712.03 cw(c134.84,-728.9) 6.1@134.84,-705.04 ; #.1@118.03,-267.83 ccw(c142.65,-267.83) 125.24,-285.24 ; 122.82,-707.18 ccw(c112.81,-697.17) 6.1@126.97,-697.17 ; 6.1@129.27,-691.6 ccw(c103.38,-665.7) 140,-665.7 ; v1@134.09,-300 ccw(c119.84,-300) 129.92,-289.92 ccw(c140,-279.84) v1@140,-294.09 ; 6.1@134.84,-697.17 ccw(c122.39,-684.71) 140,-684.71 ; v1@140,-305.91 cw(c140,-320.16) 150.08,-310.08 cw(c160.16,-300) v1@145.91,-300 ; 6.1@346.79,-702.73 cw(c332.93,-716.6) 352.54,-716.6 ; 352.54,-715.75 cw(c370.94,-715.75) 6.1@357.93,-702.73 ; 6.1@352.54,-697.03 352.54,-777.46 335,-795 135,-795 115,-775 115,-715 132.97,-697.03 147.81,-697.03 140,-689.21 140,-418.8 175,-383.8 175,-335 v1(140,-300) #.1@115,-275 ; 9.1@527.64,402.17 537.17,402.17 615,480 695,480 732.36,442.64 9.1@732.36,402.17 ; 9.1@540.43,410.04 ccw(c540.43,421.16) 9.1@548.3,413.3 ; 9.1@547.46,402.03 9.1@547.46,402.17 ; 9.1@548.31,402.17 cw(c575.21,402.17) 556.19,421.19 ; v1(575,-450) v1(720,-450) ; v1@579.18,-454.18 cw(c589.26,-464.26) 589.26,-450 cw(c589.26,-435.74) v1@579.18,-445.82 ; 704.29,384.29 ccw(c686.41,402.17) 9.1@711.69,402.17 ; 710.56,390.56 cw(c719.57,381.56) 9.1@719.57,394.29 ; v1@715.82,-454.18 ccw(c705.74,-464.26) 705.74,-450 ccw(c705.74,-435.74) v1@715.82,-445.82 ; 9.1@726.79,407.73 ccw(c713.35,421.17) 732.36,421.17 ccw(c751.37,421.17) 9.1@737.93,407.73 ; 9.1@742.36,402.17 9.1@732.36,402.17 ; v1@845.82,-29.18 ccw(c835.74,-39.26) 835.74,-25 ccw(c835.74,-10.74) v1@845.82,-20.82 ; v1(850,-25) 725,-25 670,30 670,120 695,145 695,375 722.17,402.17 9.1@732.36,402.17 ; 3.1@-692.83,77.83 -685,70 -685,-20 -655,-50 -655,-75 -630,-100 -605,-100 -495,-210 ; #.1@102.18,-272.97 #.1@112.97,-272.97 ; #.1@102.18,-272.97 104.21,-275 #.1@115,-275 ; #.1@102.18,-272.97 #.1@112.97,-272.97 ; #.1@107.83,-267.83 #.1@112.97,-272.97 ; #.1@112.97,-272.97 #.1@115,-275
  Bottom Layer w7.87: v1@-45.91,-267.83 cw(c-60.16,-267.83) -50.08,-277.92 cw(c-40,-288) v1@-40,-273.74 ; v1(-40,-267.83) -65,-292.83 -65,-348.86 U6.5@-25.11,-388.75 ; v1(140,-300) 170,-270 335,-270 515,-450 v1(575,-450) ; v1@140,-294.09 ccw(c140,-279.84) 150.08,-289.92 ccw(c160.16,-300) v1@145.91,-300 ; v1@570.82,-454.18 ccw(c560.74,-464.26) 560.74,-450 ccw(c560.74,-435.74) v1@570.82,-445.82 ; v1@715.82,-445.82 ccw(c705.74,-435.74) 720,-435.74 ccw(c734.26,-435.74) v1@724.18,-445.82 ; v1(720,-450) 720,-405 875,-250 875,-50 v1(850,-25) ; v1@850,-30.91 cw(c850,-45.16) 860.08,-35.08 cw(c870.16,-25) v1@855.91,-25
KEYY_2: 0.1 2.1 5.1 8.1 U6.6 | length 7108.2
  Top Layer w7.87: v1@-904.18,-229.18 cw(c-914.26,-239.26) -900,-239.26 cw(c-885.74,-239.26) v1@-895.82,-229.18 ; v1(-900,-225) -900,-254 -835,-319 -835,-440 -760,-515 -510,-515 -357.36,-667.64 -357.36,-697.17 -315.14,-697.17 -315,-697.03 ; v1(-825,-225) -775,-175 ; v1@-825,-219.09 ccw(c-825,-204.84) -814.92,-214.92 ccw(c-804.84,-225) v1@-819.09,-225 ; 2.1@-752.54,402.03 -547.82,402.03 -547.82,237.18 -575,210 -620,210 -655,175 -655,140 ; 2.1@-744,396.6 cw(c-730.89,383.49) -730.89,402.03 ; 2.1@-744,407.73 ccw(c-730.22,421.51) -730.22,402.03 ; -670,-175 -775,-175 ; v1@-659.18,-179.18 ccw(c-669.26,-189.26) -669.26,-175 ccw(c-669.26,-160.74) v1@-659.18,-170.82 ; v1@-659.18,10.82 cw(c-669.26,0.74) -655,0.74 cw(c-640.74,0.74) v1@-650.82,10.82 ; v1@-659.18,19.18 ccw(c-669.26,29.26) -655,29.26 ccw(c-640.74,29.26) v1@-650.82,19.18 ; v1(-655,-175) -775,-175 ; -655,165 -655,140 ; -589.78,402.03 ccw(c-589.78,421.51) 2.1@-576,407.73 ; -589.11,402.03 cw(c-589.11,383.49) 2.1@-576,396.6 ; 2.1@-550.41,396.6 cw(c-556.68,390.33) -547.82,390.33 ; -547.82,375.98 cw(c-518.66,375.98) 2.1@-539.27,396.6 ; 5.1@-362.93,-691.6 ccw(c-376.37,-678.16) -357.36,-678.16 ccw(c-338.35,-678.16) 5.1@-351.79,-691.6 ; 5.1@-357.18,-697.03 -315,-697.03 ; -325.89,-697.03 cw(c-325.89,-678.49) -339,-691.6 ccw(c-325.56,-678.16) -325.56,-697.17 ccw(c-325.56,-716.17) -339,-702.73 cw(c-325.22,-716.51) -325.22,-697.03 ; -184.78,-697.03 cw(c-184.78,-716.51) 5.1@-171,-702.73 ; -184.11,-697.03 ccw(c-184.11,-678.49) 5.1@-171,-691.6 ; 5.1@-152.46,-697.03 -315,-697.03 ; v1@4.09,-240 ccw(c-10.16,-240) -0.08,-229.92 ccw(c10,-219.84) v1@10,-234.09 ; v1(10,-240) -10.43,-219.57 -255.43,-219.57 -279.57,-195.43 -479.57,-195.43 -595,-80 -625,-80 -640,-65 -640,-40 -655,-25 v1(-655,15) -655,140 ; 0.1@137.64,847.83 352.17,847.83 385,815 385,565 435,515 715,515 v1(750,480) ; 0.1@145.43,852.83 ccw(c157.5,864.91) 157.5,847.83 ; 0.1@151,858.4 ccw(c176.51,883.92) 176.51,847.83 ; 293.49,847.83 ccw(c293.49,883.92) 0.1@319,858.4 ; 312.5,847.83 ccw(c312.5,864.91) 0.1@324.57,852.83 ; 0.1@350.16,844.96 cw(c350.16,833.17) 0.1@358.49,841.51 ; 0.1@358.03,852.83 ccw(c384.26,852.83) 365.71,834.28 ; v1@545.82,-344.18 cw(c535.74,-354.26) 550,-354.26 cw(c564.26,-354.26) v1@554.18,-344.18 ; v1(550,-340) 550,-365 565,-380 660,-380 907.18,-132.82 907.18,-67.97 702.46,-67.97 700,-65.51 700,-25 655,20 655,130 675,150 675,430 v1(690,445) ; v1@684.09,445 cw(c669.84,445) 679.92,434.92 cw(c690,424.84) v1@690,439.09 ; 8.1@694.27,-67.27 ccw(c680.45,-53.44) 700,-53.44 ; 700,-54.21 ccw(c718.47,-54.21) 8.1@705.41,-67.27 ; 8.1@725.43,-72.83 cw(c737.17,-84.57) 8.1@737.17,-67.97 ; 8.1@731,-78.4 cw(c756.18,-103.58) 756.18,-67.97 ; v1@744.09,480 ccw(c729.84,480) 739.92,490.08 ccw(c750,500.16) v1@750,485.91 ; 873.82,-67.97 cw(c873.82,-103.58) 899,-78.4 cw(c879.24,-98.16) 907.18,-98.16 ; 8.1@892.83,-67.97 cw(c892.83,-84.57) 8.1@904.57,-72.83 ; 907.18,-85.52 cw(c917.26,-85.52) 8.1@910.13,-78.4
  Bottom Layer w7.87: v1(-900,-225) v1(-825,-225) ; v1@-895.82,-229.18 cw(c-885.74,-239.26) -885.74,-225 cw(c-885.74,-210.74) v1@-895.82,-220.82 ; v1@-829.18,-229.18 ccw(c-839.26,-239.26) -839.26,-225 ccw(c-839.26,-210.74) v1@-829.18,-220.82 ; v1@-659.18,-170.82 ccw(c-669.26,-160.74) -655,-160.74 ccw(c-640.74,-160.74) v1@-650.82,-170.82 ; v1@-659.18,10.82 cw(c-669.26,0.74) -655,0.74 cw(c-640.74,0.74) v1@-650.82,10.82 ; v1(-655,-175) v1(-655,15) ; U6.6@-13.97,-377.62 -45,-346.59 -45,-310 10,-255 v1(10,-240) 45,-205 370,-205 455,-290 520,-290 550,-320 v1(550,-340) ; v1@5.82,-244.18 cw(c-4.26,-254.26) 10,-254.26 cw(c24.26,-254.26) v1@14.18,-244.18 ; v1@10,-234.09 ccw(c10,-219.84) 20.08,-229.92 ccw(c30.16,-240) v1@15.91,-240 ; v1@545.82,-335.82 ccw(c535.74,-325.74) 550,-325.74 ccw(c564.26,-325.74) v1@554.18,-335.82 ; v1@690,450 v1(690,445) 725,480 v1(750,480) ; v1@690,450.91 ccw(c690,465.16) 700.08,455.08 ccw(c710.16,445) v1@695.91,445 ; v1@745.82,475.82 ccw(c735.74,465.74) 735.74,480 ccw(c735.74,494.26) v1@745.82,484.18
KEYY_3: 1.1 4.1 7.1 U6.10 | length 4404.6
  Top Layer w7.87: 4.1@-752.18,-402.03 -547.46,-402.03 -547.46,-367.46 v1(-530,-350) ; 4.1@-729,-407.73 cw(c-715.22,-421.51) -715.22,-402.03 ; 4.1@-729,-396.6 ccw(c-715.89,-383.49) -715.89,-402.03 ; v1(-635,530) -605,530 -595,520 -470,520 -255,735 v1(-195,735) ; v1@-630.82,525.82 cw(c-620.74,515.74) -620.74,530 cw(c-620.74,544.26) v1@-630.82,534.18 ; -574.78,-402.03 cw(c-574.78,-421.51) 4.1@-561,-407.73 ; -574.11,-402.03 ccw(c-574.11,-383.49) 4.1@-561,-396.6 ; 4.1@-547.46,-390.52 ccw(c-530.99,-390.52) 4.1@-542.64,-402.17 ; -547.46,-371.51 ccw(c-511.98,-371.51) 4.1@-537.07,-396.6 ; v1@-535.91,-350 cw(c-550.16,-350) -540.08,-360.08 cw(c-530,-370.16) v1@-530,-355.91 ; v1@-529.97,-220.91 cw(c-529.89,-234.88) -520,-225 ; v1(-530,-215) -520,-225 ; v1@-524.09,-215.03 ccw(c-510.12,-215.11) -520,-225 ; 1.1@-352.18,842.97 1.1@-147.46,842.97 ; 1.1@-334.57,852.83 ccw(c-310.76,876.64) -310.76,842.97 ; 1.1@-329,858.4 ccw(c-291.75,895.65) -291.75,842.97 ; -214.15,842.97 ccw(c-214.15,864.15) v1@-199.18,849.18 ; v1@-199.18,730.82 ccw(c-209.26,720.74) -209.26,735 ccw(c-209.26,749.26) v1@-199.18,739.18 ; v1@-198.25,842.97 ccw(c-198.25,895.65) 1.1@-161,858.4 ; v1@-190.82,849.18 ccw(c-175.85,864.15) -175.85,842.97 ; -179.24,842.97 ccw(c-179.24,876.64) 1.1@-155.43,852.83 ; v1@45.82,-304.18 ccw(c35.74,-314.26) 35.74,-300 ccw(c35.74,-285.74) v1@45.82,-295.82 ; v1(50,-300) -145,-300 -196.3,-248.7 -276.3,-248.7 -300,-225 -520,-225 ; v1(520,-410) v1@522.97,-407.03 ; v1@524.18,-414.18 cw(c541.43,-431.43) 7.1@541.43,-407.03 ; 7.1@532.23,-414.17 ccw(c522.97,-416.6) v1@522.97,-407.03 ; 7.1@536.43,-407.03 7.1@547.81,-407.03 ; 7.1@565.43,-412.17 cw(c577.84,-424.57) 577.84,-407.03 ; 7.1@571,-417.73 cw(c596.85,-443.58) 596.85,-407.03 ; 713.15,-407.03 cw(c713.15,-443.58) 7.1@739,-417.73 ; 732.16,-407.03 cw(c732.16,-424.57) 7.1@744.57,-412.17 ; 7.1@752.54,-407.03 v1@522.97,-407.03
  Bottom Layer w7.87: v1@-635,524.09 cw(c-635,509.84) -624.92,519.92 cw(c-614.84,530) v1@-629.09,530 ; v1(-635,530) -540,435 -540,-215 ; -540,-253.4 cw(c-491.6,-253.4) v1@-525.82,-219.18 ; -540,-234.39 cw(c-510.61,-234.39) v1@-531.39,-213.61 ; -540,-215.38 cw(c-529.62,-215.38) -536.96,-208.04 ; -540,-214.62 ccw(c-529.62,-214.62) -536.96,-221.96 ; -540,-195.61 ccw(c-510.61,-195.61) v1@-531.39,-216.39 ; -540,-176.6 ccw(c-491.6,-176.6) v1@-525.82,-210.82 ; v1@-535.91,-349.97 ccw(c-549.88,-349.89) -540,-340 ; v1@-535.17,-217.85 ccw(c-540,-220.51) -540,-215 ; v1@-535.17,-212.15 cw(c-540,-209.49) -540,-215 ; v1@-530.03,-344.09 cw(c-530.11,-330.12) -540,-340 ; v1(-530,-350) -540,-340 ; v1(-530,-215) -540,-215 ; v1@-199.18,739.18 ccw(c-209.26,749.26) -195,749.26 ccw(c-180.74,749.26) v1@-190.82,739.18 ; v1@-199.18,840.82 cw(c-209.26,830.74) -195,830.74 cw(c-180.74,830.74) v1@-190.82,840.82 ; v1(-195,735) v1(-195,845) ; v1(50,-300) 65.87,-300 ; U6.10@52.84,-366.48 65.87,-353.46 65.87,-300 ; v1@54.18,-304.18 cw(c64.26,-314.26) 64.26,-300 cw(c64.26,-285.74) v1@54.18,-295.82 ; 65.87,-299.13 65.87,-300 ; v1@515.82,-405.82 ccw(c505.74,-395.74) 520,-395.74 ccw(c534.26,-395.74) v1@524.18,-405.82 ; v1(520,-410) 520,-335 495,-310 450,-310 360,-220 115,-220 65.87,-269.13 65.87,-300 ; -540,-340 -540,-215
M3V3: C1.1 C20.1 C23.1 C39.1 C41.1 C42.1 J1.1 Q2.S R2.1 R3.1 U4.2 U6.16 UB1.8 | length 4144.5
  Top Layer w20: v1(-815,-280) -790,-255 v1(-325,-255) ; v1(350,-410) v1(380,-410) ; 410,-440 v1(380,-410) ; 410,-410 v1(380,-410) ; 410,-380 v1(380,-410) ; 410,-225 v1(410,-100) 495,-15 v1(495,240)
  Top Layer w26: J1.1@310,-750 280,-720 280,-675 305,-650 350,-650 410,-590 410,-440 410,-410 410,-380 410,-225
  Top Layer w30: v1(495,240) v1(495,305)
  Bottom Layer w7.87: U6.16@119.65,-433.3 136.36,-450 175,-450 215,-410 303,-410 325,-432
  Bottom Layer w11.81: C42.1@325,-445 325,-432 325,-410
  Bottom Layer w16: v1(-325,-255) -325,-175 -220,-70 320,-70 350,-100 v1(410,-100)
  Bottom Layer w20: UB1.8@-848.19,-377.95 ccw(c-807.49,-377.95) -836.27,-406.73 ; v1(-815,-280) -850,-315 UB1.8@-850,-360.24 -850,-393 -773,-470 R2.1@-750,-470 R3.1@-700,-470 ; R2.1@-749,-470 cw(c-758.66,-479.66) R2.1@-745,-479.66 ; C39.1@-745,-525 R2.1@-745,-470 ; 303,-410 325,-410 v1(350,-410) v1(380,-410) C41.1@380,-437 ; Q2.S@486.94,374.34 cw(c473.28,360.69) 492.6,360.69 cw(c511.91,360.69) Q2.S@498.25,374.34 ; v1@492.6,243.53 cw(c521.5,243.53) C23.1@501.06,263.97 ; 492.6,249.59 ccw(c537.18,249.59) U4.2@505.66,218.06 ; v1@492.6,296.47 ccw(c521.5,296.47) C23.1@501.06,276.03 ; v1@492.6,311.13 cw(c517.87,311.13) C20.1@500,329 ; 492.6,348.87 ccw(c517.87,348.87) C20.1@500,331 ; U4.2@500,212.4 492.6,219.8 Q2.S@492.6,380 Q2.S@500,372.6
  Bottom Layer w26: C1.1@201.97,-895.27 ccw(c181.09,-874.37) 210.63,-874.37 ; C1.1@206.69,-900 210.63,-896.06 210.63,-874.37 ; C1.1@213.38,-900 cw(c281.89,-900) 233.44,-851.56 ; 280.91,-804.09 ccw(c226.82,-750) J1.1@303.31,-750 ; J1.1@310,-750 310,-775 210.63,-874.37
MOTO+: P3.2 U5.8 | length 208.4
  Bottom Layer w23.62: U5.8@-82.17,741.41 U5.8@-77.99,741.41 -23.59,741.41 ; -8.98,741.41 -23.59,741.41 ; 29.11,754.11 ccw(c8.36,774.86) P3.2@34.7,787.79 ; P3.2@40,790.39 40,765 16.41,741.41 -23.59,741.41
MOTO-: P3.1 U5.5 | length 205.4
  Bottom Layer w23.62: U5.5@-82.17,891.41 U5.5@-77.99,891.41 8.59,891.41 40,860 P3.1@40,839.61 ; 15.5,884.5 cw(c-29.4,839.61) P3.1@34.09,839.61